# Altium PCB PCB1.PcbDoc
Units mm, origin at the board's own origin, x right, y up, seen from the top; angles counter-clockwise.
Board outline 39.24 x 79.76 mm, 2 copper layers (Top Layer, Bottom Layer); 18 components, 22 nets, 78 pads, 14 vias.
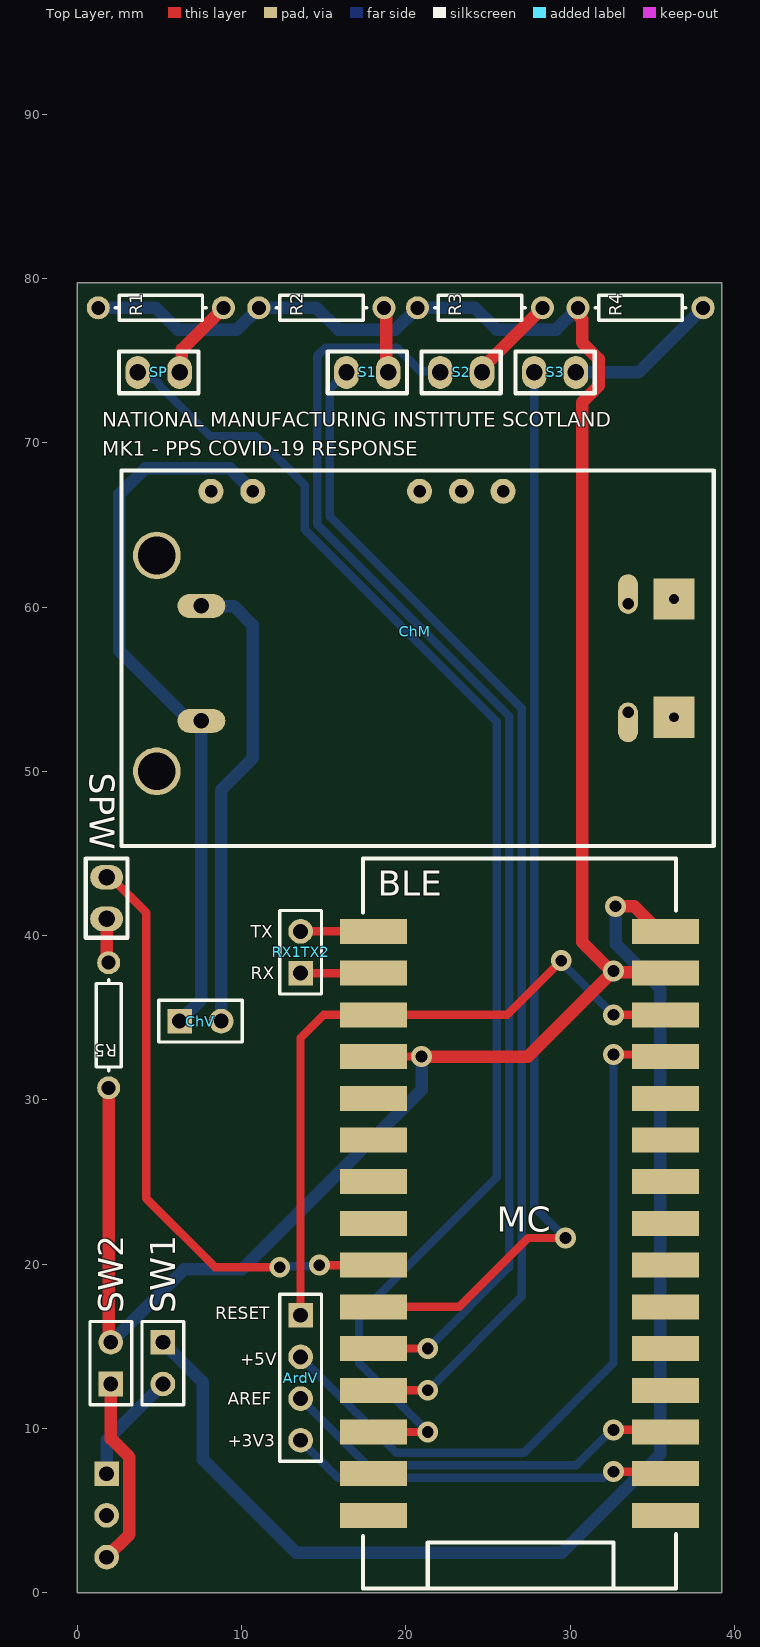
[diagram p0: Top Layer view]
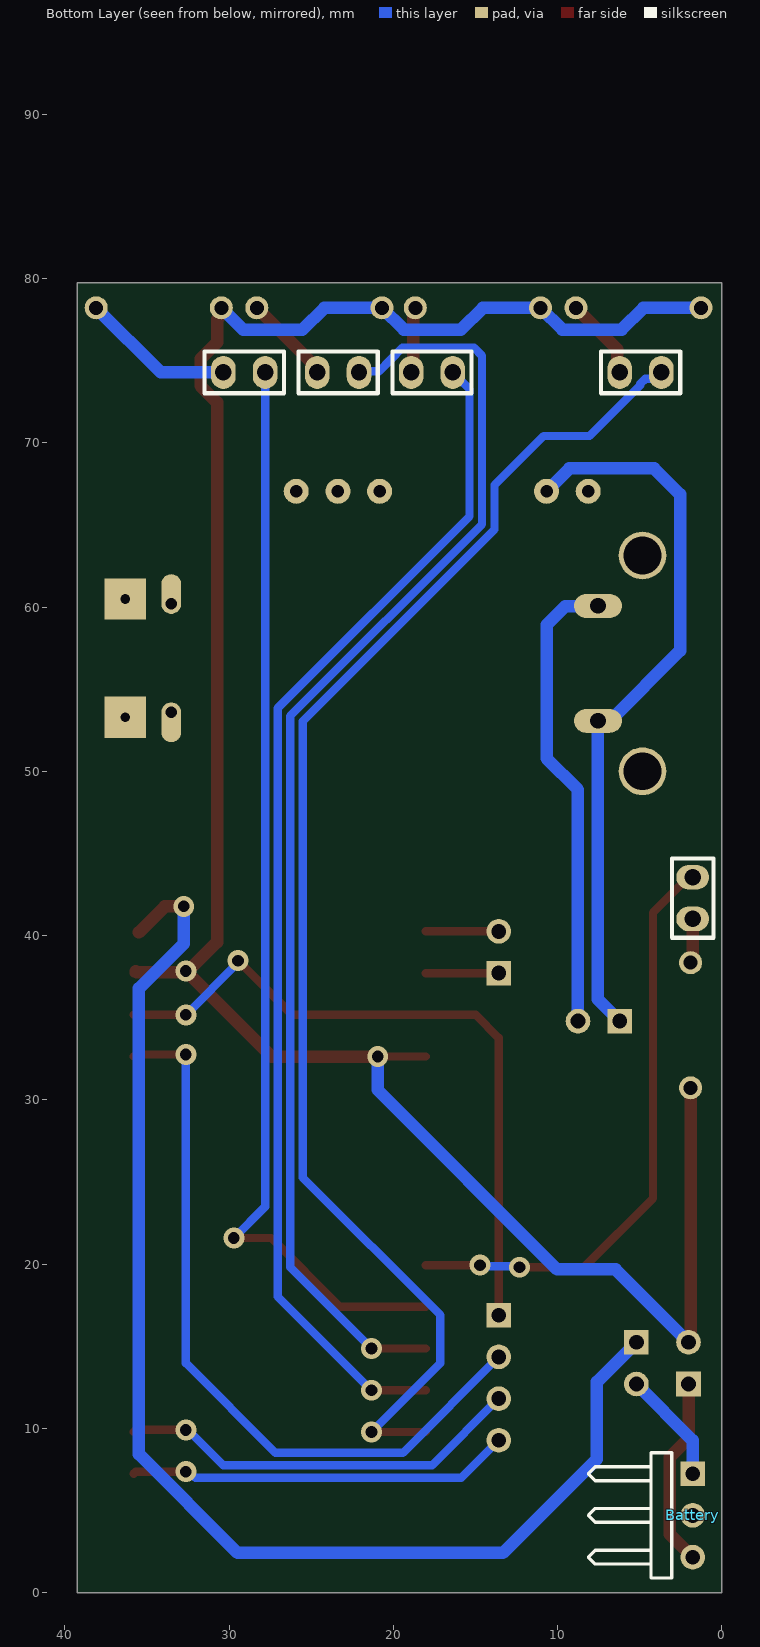
[diagram p1: Bottom Layer view, seen from below]

## Layer stack, top to bottom
Top Solder: solder mask 0.0102, Solder Resist, Dk 3.5
Top Layer: signal copper 0.0356
Dielectric 1: dielectric 0.32, FR-4, Dk 4.8
Bottom Layer: signal copper 0.0356
Bottom Solder: solder mask 0.0102, Solder Resist, Dk 3.5

## Board outline
0,0 39.243,0 39.243,79.756 0,79.756

## Design rules (kind name [scope] priority, off if disabled: settings)
Clearance [All] p1: gap=0.254 ignorepadtopadclearanceinfootprint=FALSE except(0: Arc-Hole Track-Hole SMDPad-Hole THPad-Hole Via-Hole Fill-Hole Poly-Hole Region-Hole Text-Hole)
PolygonConnect [All] p1: connectstyle=Relief reliefconductorwidth=0.254 reliefentries=4 polygonreliefangle="90 Angle" airgapwidth=0.254
RoomDefinition Sheet1 [InComponentClass('Sheet1')] p1: confinementstyle=ConfineIn formatcopy=TRUE lockcomponents=FALSE outline 0,0 39.243,0 39.243,79.883 0,79.883
RoutingVias [All] p1: holewidth=0.711 width=1.27 viastyle="Through Hole" minholewidth=0.711 minwidth=1.27 maxholewidth=0.711 maxwidth=1.27
SolderMaskExpansion [All] p1: expansion=0.102 istentingtop=FALSE
Width [All] p1: maxlimit=0.762 minlimit=0.254 preferedwidth=0.508 minimp=50.000000 maximp=50.000000 favimp=50.000000
30 further rules are at their usual default settings.

## Components (designator, comment, footprint, x,y, rotation, side; value= is the part's Value field where it differs from the comment)
ArdV "Header 4" HDR1X4 13.589,16.891 r270 top
Battery "Header 3H" HDR1X3H 1.778,7.239 r270 bottom
ChM "POWERBOOST_1000C" POWERBOOST_1000C 38.746,68.328 r180 top
ChV "Header 2" HDR1X2 6.223,34.798 r0 top
MC "NANO33BLE" ARDUINO_NANO_BLE_33 35.814,4.699 r180 top
R1 "Res1" AXIAL-0.3 5.08,78.232 r180 top value=1K
R2 "Res1" AXIAL-0.3 14.859,78.232 r180 top value=1K
R3 "Res1" AXIAL-0.3 24.511,78.232 r180 top value=1K
R4 "Res1" AXIAL-0.3 34.29,78.232 r180 top value=1K
R5 "Res1" AXIAL-0.3 1.905,34.544 r270 top value=1K
RX1TX2 "Header 2" HDR1X2 13.589,37.719 r90 top
S1 "LED_PPS" LED_PPS 16.383,74.295 r0 top
S2 "LED_PPS" LED_PPS 22.098,74.295 r0 top
S3 "LED_PPS" LED_PPS 27.813,74.295 r0 top
SP "LED_PPS" LED_PPS 3.683,74.295 r0 top
SPW "LED_PPS" LED_PPS 1.778,43.561 r270 top
SW1 "Header 2" HDR1X2 5.207,15.24 r270 top
SW2 "Header 2" HDR1X2 2.032,12.7 r90 top

## Footprints (in the part's own frame and the unit in brackets; to place one, negate y for a bottom-side part, rotate by r counter-clockwise, add the part's x,y. Pads: shape width x height; smd on the part's side, far side on the other; paste and mask are expansions set on the pad)
ARDUINO_NANO_BLE_33 [mil] "Arduino Nano 33 BLE ABX00030"
  rect 160x60 smd: +3V3(0,-100) +5V(0,-1100) A0(0,-300) A1(0,-400) A2(0,-500) A3(0,-600) A4(0,-700) A5(0,-800) A6(0,-900) A7(0,-1000) AREF(0,-200) D2(700,-1000) D3(700,-900) D4(700,-800) D5(700,-700) D6(700,-600) D7(700,-500) D8(700,-400) D9(700,-300) D10(700,-200) D11(700,-100) D12(700,0) GND(0,-1300) GND(700,-1100) RESET(0,-1200) RESET(700,-1200) RX(700,-1300) SCK(0,0) TX(700,-1400) VIN(0,-1400)
  silkscreen extent -25,-1575 725,175
AXIAL-0.3 [mm] "Axial Device, Thru-Hole; 2 Leads; 0.3 in Pin Spacing"
  round 1.4 hole 0.85: 1(-3.81,0) 2(3.81,0)
  silkscreen extent -2.77,-0.76 2.77,0.76
HDR1X2 [mm] "Connector; Header; 2 Position"
  rect 1.5x1.5 hole 0.9: 1(0,0)
  round 1.5 hole 0.9: 2(2.54,0)
  silkscreen extent -1.27,-1.27 3.81,1.27
HDR1X3H [mm] "Connector; Header; 3 Position; Right Angle"
  rect 1.5x1.5 hole 0.9: 1(0,0)
  round 1.5 hole 0.9: 2(2.54,0) 3(5.08,0)
  silkscreen extent -1.27,-6.35 6.35,-1.27
HDR1X4 [mm] "Connector; Header; 4 Position"
  rect 1.5x1.5 hole 0.9: 1(0,0)
  round 1.5 hole 0.9: 2(2.54,0) 3(5.08,0) 4(7.62,0)
  silkscreen extent -1.27,-1.27 8.89,1.27
LED_PPS [mm] "LED for PPS Sensor"
  oval 1.5x2 hole 1: N(2.54,0) P(0,0)
  silkscreen extent -1.14,-1.27 3.68,1.27
POWERBOOST_1000C [mil] "USB charger and 3.7-5V DC-DC Converter"
  round 60 hole 30: 5V(1205,50) Bat(605,50) GND(1105,50) USB(505,50) VS(705,50)
  oval 114.8x57.4 / inner round 0 / far side oval 114.8x57.4 hole 37.4: GND(1228.31,600.3) VBUS(1228.31,324.7)
  round 114.17 / inner round 0 / far side round 114.17 hole 90.55: S1(1335,203.84) S2(1335,721.16)
  oval 47.56x95.12 / inner round 0 / far side oval 47.56x95.12 hole 27.56 copper offset 0,23.78: SPRT-1(205.43,579.92)
  oval 47.56x95.12 / inner round 0 / far side oval 47.56x95.12 hole 27.56 copper offset 0,-23.78: SPRT-2(205.43,320.08)
  rect 98.43x98.43 / inner round 0 / far side rect 98.43x98.43 hole 23.62: SPRT-3(95.2,591.73) SPRT-4(95.2,308.27)
  silkscreen extent 0,0 1420,900

## Part data
ArdV: "Header, 4-Pin", LatestRevisionDate=17-Jul-2002, LatestRevisionNote="Re-released for DXP Platform.", Publisher="Altium Limited"
Battery: "Header, 3-Pin, Right Angle", LatestRevisionDate=17-Jul-2002, LatestRevisionNote="Re-released for DXP Platform.", Publisher="Altium Limited"
ChV RX1TX2 SW1 SW2: "Header, 2-Pin", LatestRevisionDate=17-Jul-2002, LatestRevisionNote="Re-released for DXP Platform.", Publisher="Altium Limited"
R1 R2 R3 R4 R5: "Resistor", LatestRevisionDate=17-Jul-2002, LatestRevisionNote="Re-released for DXP Platform.", PackageDescription="Axial Device, Thru-Hole; 2 Leads; 0.3 in Pin Spacing", PackageReference=AXIAL-0.3, Published=8-Jun-2000, Publisher="Altium Limited"

## Via types
v1: diameter 1.27, hole 0.711, Top Layer to Bottom Layer, 14 vias

## Nets (pads, with @x,y where several pads share a name; then routed paths per layer and width w, separated by ;. In a path a pad name is that pad's centre, name@x,y a point inside that pad or via, vN(x,y) a via of type N, cw(c..) or ccw(c..) an arc to the next point about the centre after c; other vN are vias at no path point)
NetArdV_1: ArdV.1 MC.RESET | length 42.5
  Top Layer w0.508: ArdV.1 13.589,33.782 14.986,35.179 18.034,35.179 26.162,35.179 v1(29.464,38.481) ; v1(32.639,35.179) MC.RESET@35.814,35.179
  Bottom Layer w0.508: v1(29.464,38.481) 29.464,38.354 v1(32.639,35.179)
NetArdV_2: ArdV.2 MC.+5V | length 45.8
  Top Layer w0.508: v1(32.639,32.766) 35.687,32.766 MC.+5V
  Bottom Layer w0.508: ArdV.2 19.431,8.509 27.178,8.509 32.639,13.97 v1(32.639,32.766)
NetArdV_3: ArdV.3 MC.AREF | length 24.9
  Top Layer w0.508: v1(32.639,9.906) 35.687,9.906 MC.AREF
  Bottom Layer w0.508: ArdV.3 17.653,7.747 30.353,7.747 32.512,9.906 v1(32.639,9.906)
NetArdV_4: ArdV.4 MC.+3V3 | length 23.4
  Top Layer w0.508: v1(32.639,7.366) 35.687,7.366 MC.+3V3
  Bottom Layer w0.508: ArdV.4 15.875,6.985 32.052,6.985 32.433,7.366 v1(32.639,7.366)
NetBattery_1: Battery.1 SW1.2 | length 6.9
  Bottom Layer w0.762: Battery.1 1.778,9.271 SW1.2
NetBattery_3: Battery.3 SW2.1 | length 11.6
  Top Layer w0.762: Battery.3 3.163,3.544 3.163,8.252 2.032,9.383 SW2.1
NetChM_GND: ChM.GND ChV.1 | length 44.5
  Bottom Layer w0.762: ChV.1 7.547,36.122 7.547,53.08 6.818,53.08 2.54,57.358 2.54,66.864 4.131,68.455 9.282,68.455 ChM.GND@10.679,67.058
NetChM_VBUS: ChM.VBUS ChV.2 | length 28.5
  Bottom Layer w0.762: ChM.VBUS 7.556,60.071 9.525,60.071 10.668,58.928 10.668,50.8 8.763,48.895 ChV.2
NetMC_D6: MC.D6 SPW.P | length 36.3
  Top Layer w0.508: SPW.P 2.028,43.561 4.191,41.398 4.191,24.003 8.382,19.812 v1(12.319,19.812) ; v1(14.732,19.939) MC.D6
  Bottom Layer w0.508: v1(12.319,19.812) 12.383,19.875 14.668,19.875 v1(14.732,19.939)
NetMC_D7: MC.D7 S3.P | length 66.9
  Top Layer w0.508: MC.D7 23.241,17.399 27.432,21.59 v1(29.718,21.59)
  Bottom Layer w0.508: S3.P 27.813,23.495 v1(29.718,21.59)
NetMC_D8: MC.D8 S2.P | length 79
  Top Layer w0.508: MC.D8 v1(21.336,14.859)
  Bottom Layer w0.508: v1(21.336,14.859) 26.289,19.812 26.289,53.363 14.605,65.047 14.605,75.311 15.097,75.803 19.444,75.803 20.181,75.066 20.884,74.363 22.03,74.363 S2.P
NetMC_D9: MC.D9 S1.P | length 72.9
  Top Layer w0.508: MC.D9 v1(21.336,12.319)
  Bottom Layer w0.508: S1.P 15.367,73.279 15.367,65.532 27.051,53.848 27.051,18.034 v1(21.336,12.319)
NetMC_D10: MC.D10 SP.P | length 84.1
  Top Layer w0.508: MC.D10 v1(21.336,9.779)
  Bottom Layer w0.508: SP.P 4.071,73.907 4.667,73.907 4.965,73.61 4.965,73.524 8.063,70.426 10.854,70.426 13.843,67.437 13.843,64.732 25.527,53.048 25.527,25.273 17.145,16.891 17.145,13.97 v1(21.336,9.779)
NetMC_GND: MC.GND R1.2 R2.2 R3.2 R4.2 R5.2 SW2.2 | length 137.3
  Top Layer w0.508: MC.GND@18.034,32.639 v1(20.955,32.639) ; MC.GND@35.687,37.846 MC.GND@35.814,37.719
  Top Layer w0.762: R5.2 1.9,30.729 1.9,15.372 SW2.2 ; v1@21.336,32.639 27.432,32.639 v1(32.639,37.846) ; R4.2 30.602,78.11 30.602,77.659 30.734,77.527 30.734,76.123 31.738,75.119 31.738,73.471 30.734,72.467 30.734,39.614 32.502,37.846 v1(32.639,37.846) ; MC.GND@35.687,37.846 35.623,37.782 32.703,37.782 v1(32.639,37.846)
  Bottom Layer w0.762: R1.2 4.775,78.232 6.11,76.897 9.714,76.897 R2.2 14.554,78.232 15.889,76.897 19.366,76.897 R3.2 24.206,78.232 25.541,76.897 29.145,76.897 R4.2 ; SW2.2 6.477,19.685 10.033,19.685 20.955,30.607 v1(20.955,32.639)
NetMC_RX: MC.RX RX1TX2.1 | length 4.4
  Top Layer w0.508: RX1TX2.1 MC.RX
NetMC_TX: MC.TX RX1TX2.2 | length 4.4
  Top Layer w0.508: RX1TX2.2 MC.TX
NetMC_VIN: MC.VIN SW1.1 | length 78.7
  Top Layer w0.762: v1(32.766,41.783) 33.909,41.783 MC.VIN@35.496,40.195
  Bottom Layer w0.762: SW1.1 7.62,12.827 7.62,8.128 13.335,2.413 29.482,2.413 35.495,8.426 35.495,36.786 32.766,39.515 v1(32.766,41.783)
NetR1_1: R1.1 SP.N | length 5
  Top Layer w0.762: SP.N 6.364,74.436 6.364,75.706 R1.1
NetR2_1: R2.1 S1.N | length 4
  Top Layer w0.762: R2.1 18.791,78.11 18.791,74.427 S1.N
NetR3_1: R3.1 S2.N | length 5.5
  Top Layer w0.762: S2.N 24.638,74.547 28.321,78.23 R3.1
NetR4_1: R4.1 S3.N | length 9.4
  Bottom Layer w0.762: S3.N 34.163,74.295 R4.1
NetR5_1: R5.1 SPW.N | length 2.7
  Top Layer w0.762: R5.1@1.778,38.354 SPW.N
pads on no net: Battery.2 ChM.5V ChM.Bat ChM.S1 ChM.S2 ChM.SPRT-1 ChM.SPRT-2 ChM.SPRT-3 ChM.SPRT-4 ChM.USB ChM.VS MC.A0 MC.A1 MC.A2 MC.A3 MC.A4 MC.A5 MC.A6 MC.A7 MC.D2 MC.D3 MC.D4 MC.D5 MC.D11 MC.D12 MC.SCK

## Other copper
Top Layer:
  region net NetMC_GND: 12.319,93.599
Bottom Layer:
  region net NetChM_GND: 7.493,53.027

## Silkscreen, mask and mechanical layers (free items; w line width, h text height)
Top Overlay:
  text "NATIONAL MANUFACTURING INSTITUTE SCOTLAND" at 1.524,70.993 h0.9
  text "MK1 - PPS COVID-19 RESPONSE" at 1.524,69.215 h0.9
  text "TX" at 10.541,39.878 h0.76
  text "RX" at 10.541,37.338 h0.76
  text "RESET" at 8.382,16.637 h0.76
  text "+5V" at 9.906,13.843 h0.76
  text "AREF" at 9.144,11.43 h0.76
  text "+3V3" at 9.144,8.89 h0.76

## Text inside footprints (layer, text, board x,y; h text height)
MC: Top Overlay "BLE" at 18.289,42.418 h1.52